# Altium PCB v010 pcb.PcbDoc
Units mm, origin at the board's own origin, x right, y up, seen from the top; angles counter-clockwise.
Board outline 11.24 x 5.74 mm, 2 copper layers (Top Layer, Bottom Layer); 10 components, 30 nets, 77 pads, 25 vias.
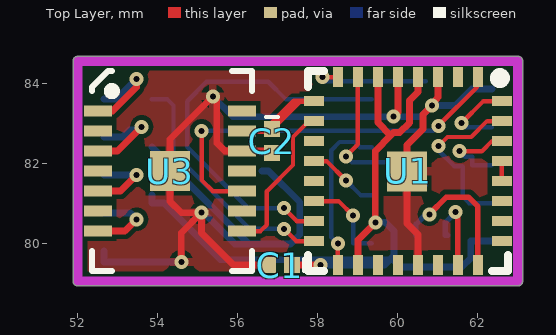
[diagram p0: Top Layer view]
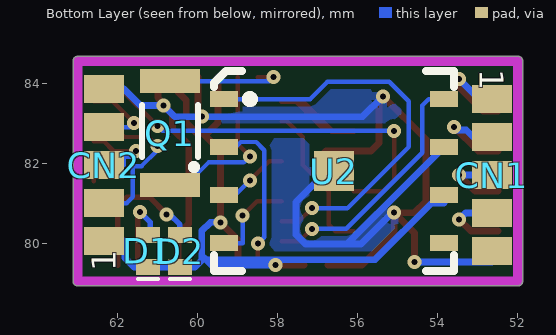
[diagram p1: Bottom Layer view, seen from below]

## Layer stack, top to bottom
Top Layer: signal copper 0.0356
Dielectric: prepreg 0.32, FR-4, Dk 4.8
Bottom Layer: signal copper 0.0356

## Board outline
52,78.93 cw(c52,79.05) 51.88,79.05 51.88,84.55 cw(c52,84.55) 52,84.67 63,84.67 cw(c63,84.55) 63.12,84.55 63.12,79.05 cw(c63,79.05) 63,78.93

## Design rules (kind name [scope] priority, off if disabled: settings)
Clearance Clearance_Pad [All vs IsPad] p1: gap=0.12
Clearance Clearance_Via [(IsVia) vs (IsVia)] p2: gap=0.12
Clearance Polygon [InPoly vs IsPad] p3: gap=0.15
Clearance [All] p4: gap=0.12
FabricationTestPointUsage TestPointUsage [All] p1: valid=0 allowmultiple=FALSE
FabricationTestpoint Testpoint [All] p1: side=3 testpointundercomponent=TRUE minsize=1.016 maxsize=2.54 preferedsize=1.524 minholesize=0 maxholesize=1.016 preferedholesize=0.813 testpointgrid=0.025 allowsidetop=TRUE allowsidebottom=TRUE usegrid=TRUE gridtolerance=0
HoleSize [All] p1: absolutevalues=TRUE maxlimit=2.54 minlimit=0.04 maxpercent=80.000 minpercent=20.000
PlaneClearance [All] p1: clearance=0.3
PlaneConnect [All] p1: planeconnectstyle=Relief reliefexpansion=0.2 reliefentries=4 reliefconductorwidth=0.2 reliefairgap=0.2
PolygonConnect [All] p1: connectstyle=Relief reliefconductorwidth=0.2 reliefentries=4 polygonreliefangle="90 Angle"
RoomDefinition "v007slim schematics" [InComponentClass('v007slim schematics')] p1: confinementstyle=ConfineIn formatcopy=TRUE lockcomponents=FALSE outline 72.55,78.8 75.9,78.8 75.9,82.85 72.55,82.85
RoutingCorners [All] p1: cornerstyle=Round minsetback=1 maxsetback=1
RoutingVias [All] p1: holewidth=0.15 width=0.35 viastyle="Through Hole" minholewidth=0.15 minwidth=0.35 maxholewidth=0.15 maxwidth=0.35
SMDNeckDown [All] p1: percent=100.000
SilkscreenOverComponentPads [All] p1: minsilkscreentomaskgap=0.254
SolderMaskExpansion SolderMaskExpansion_1 [(IsVia)] p1: expansion=-0.2
SolderMaskExpansion [All] p2: expansion=0.05
Width Width_3 [(InNet('PD5') OR InNet('PC0') OR InNet('PC1') OR InNet('NetGreen Led_1'))] p1: maxlimit=0.14 minlimit=0.14 preferedwidth=0.14
Width Width_2 [(InNet('HEAD 1') OR InNet('HEAD 2') OR InNet('HEAD 3') OR InNet('HCOMMON'))] p2: maxlimit=0.17 minlimit=0.17 preferedwidth=0.17
Width Width_1 [(InNet('GND') OR InNet('VCC'))] p3: maxlimit=0.17 minlimit=0.17 preferedwidth=0.17
Width [All] p4: maxlimit=0.11 minlimit=0.11 preferedwidth=0.11
21 further rules are at their usual default settings.

## Components (designator, comment, footprint, x,y, rotation, side; value= is the part's Value field where it differs from the comment)
C1 "100nF" CC0603(0201) 57.35,79.3 r180 top
C2 "100nF" CC0603(0201) 57,82.85 r270 top
CN1 "5pin smd" SU05LSR 52.65,83.6 r270 bottom
CN2 "5pin smd" SU05LSR 62.35,80.05 r90 bottom
D1 "LED1" CC1005(0402) 61.5,79.3 r90 bottom
D2 "LED1" CC1005(0402) 60.7,79.3 r90 bottom
Q1 "32.768khz crystal 1.5 x 3.2mm" "Quartz SMD 2" 61.6,81.05 r90 bottom
U1 "ATMEL ATMEGA168V-10MU-ND" "32M1-A L 5" 62.85,84.4 r270 top
U2 "ATMEL 4MBit DataFlash" "8m1-a mlf 4" 59.6,84.3 r180 bottom
U3 "Asic 3V MLF14" "DELTA ASIC - 6" 56.35,84.3 r270 top

## Footprints (in the part's own frame and the unit in brackets; to place one, negate y for a bottom-side part, rotate by r counter-clockwise, add the part's x,y. Pads: shape width x height; smd on the part's side, far side on the other; paste and mask are expansions set on the pad)
"8m1-a mlf 4" [mm] "for at45db161d"
  rect 0.7x0.4 smd: 1(0.25,-0.7) 2(0.25,-1.9) 3(0.25,-3.1) 4(0.25,-4.3) 5(5.75,-4.3) 6(5.75,-3.1) 7(5.75,-1.9) 8(5.75,-0.7)
  rect 1x1 smd: 9(3,-2.5)
  silkscreen extent 0,-5 6,0, body extent 0,-5 6,0, height 1
"32M1-A L 5" [mm] "atmel uc modified"
  rect 0.5x0.25 smd: 1(0.25,-0.85) 2(0.25,-1.35) 3(0.25,-1.85) 4(0.25,-2.35) 5(0.25,-2.85) 6(0.25,-3.35) 7(0.25,-3.85) 8(0.25,-4.35) 17(4.95,-4.35) 18(4.95,-3.85) 19(4.95,-3.35) 20(4.95,-2.85) 21(4.95,-2.35) 22(4.95,-1.85) 23(4.95,-1.35) 24(4.95,-0.85)
  rect 0.25x0.5 smd: 9(0.85,-4.95) 10(1.35,-4.95) 11(1.85,-4.95) 12(2.35,-4.95) 13(2.85,-4.95) 14(3.35,-4.95) 15(3.85,-4.95) 16(4.35,-4.95) 25(4.35,-0.25) 26(3.85,-0.25) 27(3.35,-0.25) 28(2.85,-0.25) 29(2.35,-0.25) 30(1.85,-0.25) 31(1.35,-0.25) 32(0.85,-0.25)
  rect 1x1 smd: 33(2.607,-2.624)
  silkscreen extent 0.1,-5.1 5.1,-0.1, body extent 0.1,-5.1 5.1,-0.1, height 1
CC0603(0201) [mm]
  rect 0.4x0.4 smd: 1(0,-0.15) 2(0.6,-0.15)
  silkscreen extent -0.3,-0.3 -0.3,0, body extent 0,-0.3 0.6,0, height 1
CC1005(0402) [mm]
  rect 0.4x0.6 smd: 1(0.1,-0.25) 2(0.9,-0.25)
  silkscreen extent -0.2,-0.5 -0.2,0, body extent 0,-0.5 1,0, height 1
"DELTA ASIC - 6" [mm]
  rect 0.28x0.7 smd: 1(1,-3.85) 2(1.5,-3.85) 3(2,-3.85) 4(2.5,-3.85) 5(3,-3.85) 6(3.5,-3.85) 7(4,-3.85) 8(4,-0.25) 9(3.5,-0.25) 10(3,-0.25) 11(2.5,-0.25) 12(2,-0.25) 13(1.5,-0.25) 14(1,-0.25)
  rect 1x1 smd: 15(2.5,-2.05)
  silkscreen extent 0,-4 5,0, body extent 0,-4 5,0, height 0.7
"Quartz SMD 2" [mm] "CC7V-T1A"
  rect 0.6x1.5 smd: 1(0.4,-0.9) 2(3,-0.9)
  silkscreen extent 0.8,-1.6 2.4,-0.2, body extent 0.1,-1.65 3.3,-0.15, height 0.5
SU05LSR [mm]
  rect 0.7x1 smd: 1(0,0) 2(0.95,0) 3(1.9,0) 4(2.85,0) 5(3.8,0)

## Part data
C1 C2: library part Cap, "Capacitor"
CN1: "No component mounted"
D1: library part LED3, "Typical BLUE SiC LED"
D2: library part LED3, "LED 0402 RED 465NM TRANSPARENT"
Q1: library part "2pin smd", "CRYSTAL 32.768KHZ 1.5 x 3.2mm"
U1: library part ATmega8L-8MC, "ATMEL ATMEGA168V-10MU"
U2: library part at45db041b
U3: library part "delta asic 3volt"

## Via types
v1: diameter 0.35, hole 0.15, Top Layer to Bottom Layer, 25 vias

## Nets (pads, with @x,y where several pads share a name; then routed paths per layer and width w, separated by ;. In a path a pad name is that pad's centre, name@x,y a point inside that pad or via, vN(x,y) a via of type N, cw(c..) or ccw(c..) an arc to the next point about the centre after c; other vN are vias at no path point)
ADC6: U1.19
ADC7: U1.22
GND: C1.2 C2.2 CN1.5 CN2.5 U1.3 U1.5 U1.21 U1.33 U2.7 U2.9 U3.12 U3.15 | length 36.6
  Top Layer w0.17: v1(54.585,79.527) 54.585,80.252 v1(55.093,80.76) ; C1.2 55.894,79.45 55.093,80.252 v1(55.093,80.76) ; C2.2 56.8,82.3 U3.12 55.674,82.3 55.473,82.501 55.473,83.567 v1(55.372,83.668) 54.3,82.596 U3.15 54.3,81.044 54.585,80.76 v1(55.093,80.76) ; v1(59.893,83.16) 60,83.266 U1.5 ; U1.21 60.5,80.213 60.226,80.487 U1.33 60.226,82.45 60.631,82.855 60.631,83.211 v1(60.858,83.439) 61,83.646 U1.3
  Bottom Layer w0.17: CN1.5 52.65,79.527 v1(54.585,79.527) ; U2.7 56.274,79.976 ; v1(55.093,80.76) 55.14,80.76 55.924,79.976 56.274,79.976 ; v1(55.372,83.668) 55.88,83.16 v1(59.893,83.16) ; U2.9 56.769,81.8 57.547,81.022 57.547,80.21 57.313,79.976 ; CN2.5 61.849,83.85 61.438,83.439 v1(60.858,83.439) 60.579,83.16 ; 56.274,79.976 57.313,79.976 ; 56.274,79.976 57.313,79.976 ; v1(59.893,83.16) 60.579,83.16 ; v1(59.893,83.16) 60.579,83.16
HCOMMON: CN1.1 U3.1 | length 2.4
  Top Layer w0.17: U3.1 52.871,83.3 53.467,83.896 v1(53.467,84.099)
  Bottom Layer w0.17: CN1.1 52.968,83.6 v1(53.467,84.099)
"HEAD 1": CN1.2 U3.3 | length 2.4
  Top Layer w0.17: U3.3 52.988,82.3 v1(53.594,82.906)
  Bottom Layer w0.17: CN1.2 53.111,82.65 53.291,82.829 53.518,82.829 v1(53.594,82.906)
"HEAD 2": CN1.3 U3.5 | length 1.9
  Top Layer w0.17: U3.5 53.067,81.3 v1(53.467,81.7)
  Bottom Layer w0.17: CN1.3 v1(53.467,81.7)
"HEAD 3": CN1.4 U3.7 | length 2
  Top Layer w0.17: U3.7 53.173,80.3 v1(53.467,80.594)
  Bottom Layer w0.17: CN1.4 53.311,80.75 v1(53.467,80.594)
PB0: U1.12 U2.3 | length 1.8
  Top Layer w0.11: U1.12 58.217,82.05 v1(58.699,81.567)
  Bottom Layer w0.11: v1(58.699,81.567) 59.067,81.2 U2.3
PB1: U1.13
PB2: U1.14 U2.4 | length 2.3
  Top Layer w0.11: U1.14 58.516,81.05 v1(58.883,80.683)
  Bottom Layer w0.11: v1(58.883,80.683) 58.883,80 U2.4
PB3: U1.15 U2.1 | length 10.1
  Top Layer w0.11: v1(57.15,80.874) 57.474,80.55 U1.15
  Bottom Layer w0.11: v1(57.15,80.874) 56.261,80.874 54.731,82.403 54.731,83.546 55.216,84.031 56.761,84.031 57.192,83.6 U2.1
PB4: U1.16 U2.8 | length 6.2
  Top Layer w0.11: v1(57.15,80.357) 57.457,80.05 U1.16
  Bottom Layer w0.11: U2.8 54.23,83.6 54.391,83.439 54.391,82.259 56.293,80.357 v1(57.15,80.357)
PB5: U1.17 U2.2 | length 4.1
  Top Layer w0.11: U1.17 v1(58.5,79.985)
  Bottom Layer w0.11: v1(58.5,79.985) 58.338,80.146 58.338,82.321 58.543,82.526 58.924,82.526 59.049,82.4 U2.2
PC0: D1.2 U1.23 | length 2.1
  Top Layer w0.14: v1(61.443,80.772) 61.5,80.715 U1.23
  Bottom Layer w0.14: D1.2 61.189,80.2 61.189,80.518 v1(61.443,80.772)
PC1: D2.2 U1.24 | length 3.7
  Top Layer w0.14: v1(60.785,80.719) 61.214,81.148 61.767,81.148 62,80.915 U1.24
  Bottom Layer w0.14: D2.2 60.45,80.463 60.706,80.719 v1(60.785,80.719)
PC2: U1.25
PC3: U1.26
PC4: U1.27
PD2: CN2.4 U1.32 | length 2
  Top Layer w0.11: v1(61.595,83.007) 62.138,83.55 U1.32
  Bottom Layer w0.11: v1(61.595,83.007) 61.702,82.9 CN2.4
PD3: U1.1 U3.10 | length 9.9
  Top Layer w0.11: v1(55.093,82.804) 55.093,81.579 55.372,81.3 U3.10 ; v1(61.011,82.931) 61.976,83.896 U1.1
  Bottom Layer w0.11: v1(55.093,82.804) 60.884,82.804 v1(61.011,82.931)
PD4: U1.2
PD5: C2.1 U1.9 U3.13 | length 3.5
  Top Layer w0.14: U3.13 56.654,82.8 56.777,82.923 57.404,83.55 57.55,83.55 ; C2.1 57.55,83.55 ; 57.55,83.55 U1.9 57.55,83.55
PD6: U1.10 U3.8 | length 3.8
  Top Layer w0.11: U3.8 56.565,80.3 56.725,80.46 56.725,81.298 57.379,81.952 57.379,82.651 57.778,83.05 U1.10
PD7: U1.11
RST: U1.28 U1.29 | length 0.5
  Top Layer w0.11: U1.28 U1.29
RX: CN2.3 U1.30 | length 2.2
  Top Layer w0.11: v1(61.544,82.296) 62.1,82.296 62.354,82.55 U1.30
  Bottom Layer w0.11: v1(61.544,82.296) 61.685,82.155 61.855,82.155 61.855,81.95 CN2.3
TOSC1: Q1.1 U1.7 | length 4.4
  Top Layer w0.11: v1(58.699,82.169) 59,82.47 U1.7
  Bottom Layer w0.11: v1(58.699,82.169) 58.852,82.017 59.733,82.017 60.3,81.45 Q1.1
TOSC2: Q1.2 U1.8 | length 3
  Top Layer w0.11: v1(58.111,84.15) U1.8
  Bottom Layer w0.11: v1(58.111,84.15) 58.211,84.05 Q1.2
TX: CN2.2 U1.31 | length 4.3
  Top Layer w0.11: v1(61.011,82.423) 61.239,82.652 61.832,82.652 62.23,83.05 U1.31
  Bottom Layer w0.11: v1(61.011,82.423) 61.011,82.321 61.407,81.925 61.625,81.925 61.625,81.153 61.778,81 CN2.2
VCC: C1.1 CN2.1 D1.1 D2.1 U1.4 U1.6 U1.18 U2.6 | length 21.6
  Top Layer w0.17: C1.1 v1(58.064,79.45) ; U1.18 59,80.082 v1(59.436,80.518) 59.436,82.306 59.821,82.691 ; U1.6 59.5,83.011 59.821,82.691 ; U1.4 60.5,83.776 60.29,83.566 60.29,83.007 60.046,82.763 59.893,82.763 ; 59.821,82.691 59.893,82.763 ; 59.821,82.691 59.893,82.763
  Bottom Layer w0.17: U2.6 53.85,81.001 54.153,81.001 55.568,79.585 58.064,79.585 59.798,79.585 ; v1(58.064,79.45) 59.663,79.45 59.798,79.585 ; v1(59.436,80.518) 59.69,80.518 59.906,80.302 ; CN2.1 61.824,80.05 61.824,79.629 61.595,79.4 D1.1 60.833,79.4 D2.1 60.071,79.4 59.906,79.565 59.906,79.693 ; 59.798,79.585 59.906,79.693 ; 59.798,79.585 59.906,79.693 ; 59.906,79.693 59.906,80.302 ; 59.906,79.693 59.906,80.302
pads on no net: U1.20 U2.5 U3.2 U3.4 U3.6 U3.9 U3.11 U3.14

## Polygon pours and split planes (outlines as drawn)
GND on Top Layer "Bottom Layer-No Net" (solid, pour order 1000): 51.9,84.5 63,84.5 63,79.1 51.9,79.1
GND on Bottom Layer "Bottom Layer-No Net" (solid, pour order 1001): 63.05,84.5 63.012,84.449 63.012,79.1 51.938,79.1 51.9,79.151 51.9,84.5

## Keep-outs
Keep-Out Layer:
  lines w0.24: 52,79.05 63,79.05 63,84.55 52,84.55 52,79.05

## Dimensions
52,79.05 to 52,84.55 on Mechanical 1
52,79.05 to 63,79.05 on Mechanical 1

## Text inside footprints (layer, text, board x,y; h text height)
CN1: Bottom Overlay "1" at 52.95,84.35 h0.6 r90
CN2: Bottom Overlay "1" at 62.05,79.3 h0.6 r270